# Altium PCB A6.PcbDoc
Units mm, origin at the board's own origin, x right, y up, seen from the top; angles counter-clockwise.
Board outline 91 x 91 mm, 2 copper layers (Top Layer, Bottom Layer); 15 components, 15 nets, 44 pads, 3 vias.
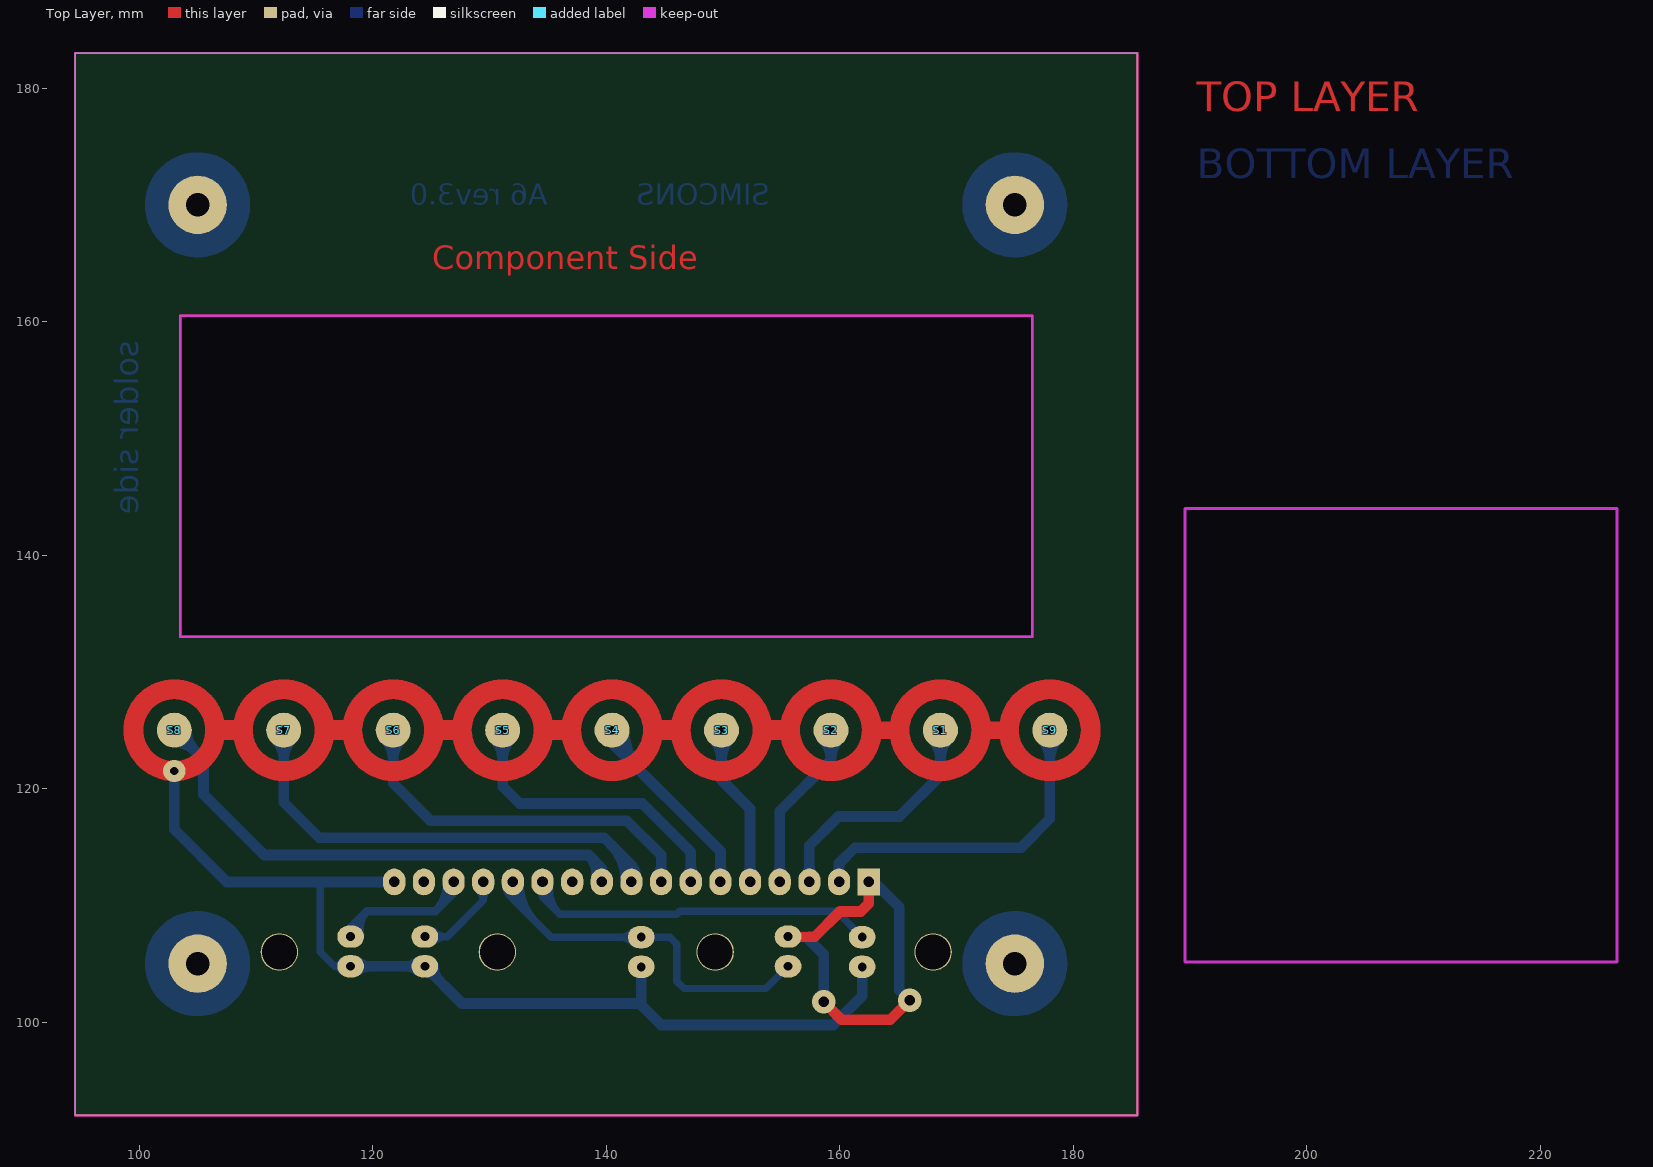
[diagram p0: Top Layer view]
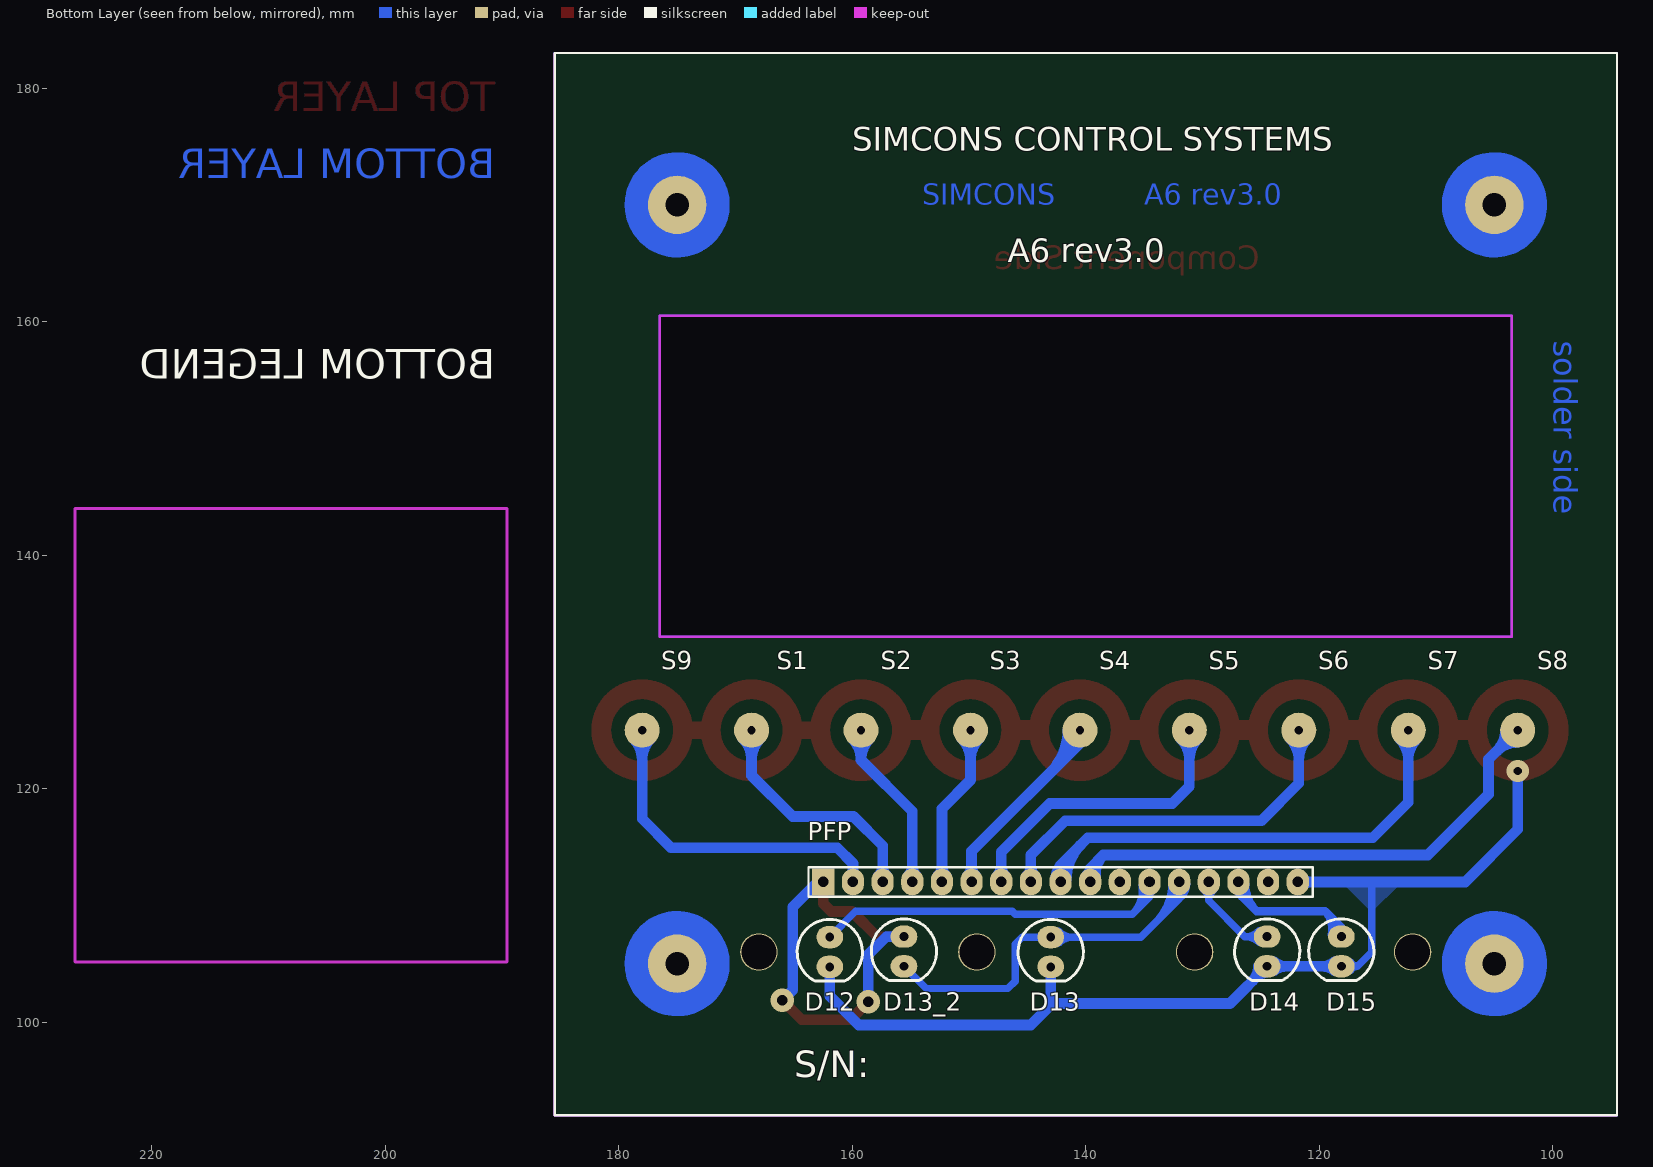
[diagram p1: Bottom Layer view, seen from below]

## Layer stack, top to bottom
Top Solder: solder mask 0.0102, Solder Resist, Dk 3.5
Top Layer: signal copper 0.0356
Dielectric1: dielectric 0.32, FR-4, Dk 4.8
Bottom Layer: signal copper 0.0356
Bottom Solder: solder mask 0.0102, Solder Resist, Dk 3.5

## Board outline
94.5,92 185.5,92 185.5,183 94.5,183
cut-out: 103.5,133 176.5,133 176.5,160.5 103.5,160.5

## Design rules (kind name [scope] priority, off if disabled: settings)
Clearance [All] p1: gap=0.508
PolygonConnect [All] p1: connectstyle=Direct reliefconductorwidth=0.254 reliefentries=4 polygonreliefangle="90 Angle" airgapwidth=0.254
RoutingVias [All] p1: holewidth=0.711 width=1.27 viastyle="Through Hole" minholewidth=0.711 minwidth=1.27 maxholewidth=1 maxwidth=2.286
SilkToSilkClearance [All] p1: silktosilkclearance=0
SilkToSolderMaskClearance SilkscreenOverComponentPads [IsPad] p1: minsilkscreentomaskgap=0 clearancetoexposedcopper=TRUE
SolderMaskExpansion [All] p1: expansion=0.102
Width [All] p1: maxlimit=2 minlimit=0.635 preferedwidth=0.635
27 further rules are at their usual default settings.

## Components (designator, comment, footprint, x,y, rotation, side; value= is the part's Value field where it differs from the comment)
D12 "RED LED 3MM" LEDSMALL 161.925,106 r180 bottom
D13 "GREEN LED 3MM" LEDSMALL 143,106 r180 bottom
D13_2 "GREEN LED 3MM" LEDSMALL 155.575,106.045 r180 bottom
D14 "GREEN LED 3MM" LEDSMALL 124.46,106.045 r180 bottom
D15 "YELLOW LED 3MM" LEDSMALL 118.11,106.045 r180 bottom
PFP "MHDR1X17" HDR1X17_BURGE_M_ST 162.48,112 r180 bottom locked
S1 "8MM DOM SWITCH" DOMKEY8MM 168.625,125 r0 top
S2 "8MM DOM SWITCH" DOMKEY8MM 159.25,125 r0 top
S3 "8MM DOM SWITCH" DOMKEY8MM 149.875,125 r0 top
S4 "8MM DOM SWITCH" DOMKEY8MM 140.5,125 r0 top
S5 "8MM DOM SWITCH" DOMKEY8MM 131.125,125 r0 top
S6 "8MM DOM SWITCH" DOMKEY8MM 121.75,125 r0 top
S7 "8MM DOM SWITCH" DOMKEY8MM 112.375,125 r0 top
S8 "8MM DOM SWITCH" DOMKEY8MM 103,125 r0 top
S9 "8MM DOM SWITCH" DOMKEY8MM 178,125 r0 top

## Footprints (in the part's own frame and the unit in brackets; to place one, negate y for a bottom-side part, rotate by r counter-clockwise, add the part's x,y. Pads: shape width x height; smd on the part's side, far side on the other; paste and mask are expansions set on the pad)
DOMKEY8MM [mm]
  round 3 hole 0.711: 1(0,0)
HDR1X17_BURGE_M_ST [mm] "Connector; Header; 17 Position"
  rect 1.905x2.286 hole 0.9: 1(0,0)
  oval 1.905x2.286 hole 0.9: 2(2.54,0) 3(5.08,0) 4(7.62,0) 5(10.16,0) 6(12.7,0) 7(15.24,0) 8(17.78,0) 9(20.32,0) 10(22.86,0) 11(25.4,0) 12(27.94,0) 13(30.48,0) 14(33.02,0) 15(35.56,0) 16(38.1,0) 17(40.64,0)
  silkscreen extent -1.27,-1.27 41.91,1.27, body extent -1.27,-1.27 41.91,1.27, height 8.54
LEDSMALL [mil]
  oval 90x75 hole 30: 1(0,50) 2(0,-50)
  silkscreen extent -110,-98 110,110, body extent -109,-110 110,110, height 340

## Part data
D12 D13 D13_2 D14 D15: library part LED1, "3mm LED"
PFP: "Header, 17-Pin"
S1 S2 S3 S4 S5 S6 S7 S8 S9: library part SW-PB, "Switch"

## Free pads (board coordinates)
  round 5 hole 2: 0(105,170) 1(175,170) 2(175,105) 3(105,105)
  round 3.2 hole 3: LED1(112,106) LED2(130.667,106) LED3(149.333,106) LED4(168,106)

## Via types
v1: diameter 2.032, hole 0.9, Top Layer to Bottom Layer, 2 vias
v2: diameter 1.905, hole 0.711, Top Layer to Bottom Layer, 1 vias

## Nets (pads, with @x,y where several pads share a name; then routed paths per layer and width w, separated by ;. In a path a pad name is that pad's centre, name@x,y a point inside that pad or via, vN(x,y) a via of type N, cw(c..) or ccw(c..) an arc to the next point about the centre after c; other vN are vias at no path point)
CDG_IN: PFP.10 S8.1 | length 52
  Bottom Layer w0.914: S8.1@103,123.957 cw(c103,121.44) 104.78,123.22 cw(c106.56,125) S8.1@104.043,125 ; S8.1 105.5,122.5 105.5,119.5 110.7,114.3 138.5,114.3 ; PFP.10@139.133,112.279 ccw(c136.885,112.685) 138.5,114.3 ; PFP.10@139.323,112.587 ccw(c138.879,113.18) 139.62,113.18 ; PFP.10@139.62,112 139.62,113.18 ; PFP.10@139.917,112.587 cw(c140.361,113.18) 139.62,113.18 ; 138.5,114.3 139.62,113.18
CM_IN: PFP.9 S7.1 | length 50.3
  Bottom Layer w0.914: S7.1@111.638,124.263 cw(c109.857,122.482) 112.375,122.482 cw(c114.893,122.482) S7.1@113.112,124.263 ; S7.1 112.375,118.825 115.427,115.773 139.827,115.773 142.16,113.44 PFP.9@142.16,112 ; 140.431,115.169 cw(c137.452,112.191) PFP.9@141.665,112.191 ; PFP.9@141.81,112.541 ccw(c140.964,113.386) 142.16,113.386 ccw(c143.356,113.386) PFP.9@142.51,112.541 ; 141.992,113.608 cw(c140.574,112.19) PFP.9@142.579,112.19
DOWN_IN: PFP.5 S3.1 | length 19.8
  Bottom Layer w0.914: S3.1@149.138,124.263 cw(c147.357,122.482) 149.875,122.482 cw(c152.393,122.482) S3.1@150.612,124.263 ; S3.1 149.875,120.725 152.32,118.28 PFP.5@152.32,112 ; PFP.5@151.97,112.541 ccw(c151.124,113.386) 152.32,113.386 ccw(c153.516,113.386) PFP.5@152.67,112.541
FAULTIND_P: D12.1 PFP.12 | length 43.4
  Bottom Layer w0.635: PFP.12@134.327,111.211 cw(c134.149,110.714) 134.673,110.782 cw(c135.197,110.85) PFP.12@134.899,111.285 ; PFP.12@134.54,112 134.54,110.697 ; D12.1 159.721,109.474 146.304,109.474 146.05,109.22 136.017,109.22 ; 134.54,110.697 cw(c135.197,110.697) 134.863,111.263 ccw(c135.197,110.697) 134.54,110.697 ; 134.54,110.697 ccw(c133.883,110.697) 134.217,111.263 cw(c133.883,110.697) 134.54,110.697 ; 134.54,110.697 136.017,109.22 ; 136.017,109.22 cw(c138.127,111.33) 135.169,111.725 ccw(c138.127,111.33) 136.017,109.22 ; PFP.12@134.54,111.809 ccw(c136.525,111.544) 135.109,110.128 cw(c136.525,111.544) PFP.12@134.54,111.809
GCONTACT_P: D13.1 D13_2.2 PFP.13 | length 56
  Bottom Layer w0.635: PFP.13@131.683,111.26 cw(c130.916,109.932) 132.397,110.329 cw(c133.878,110.725) PFP.13@132.55,111.492 ; PFP.13@132,112 132,110.57 ; D13_2.2 153.67,102.87 146.685,102.87 146.05,103.505 146.05,106.68 145.46,107.27 D13.1 135.3,107.27 132,110.57 ; 132,110.57 cw(c132.892,110.57) 132.371,111.294 ccw(c132.892,110.57) 132,110.57 ; 132,110.57 ccw(c131.108,110.57) 131.629,111.294 cw(c131.108,110.57) 132,110.57 ; 141.123,107.27 cw(c141.123,105.584) 142.316,106.776 ccw(c141.123,105.584) 141.123,107.27 ; 141.123,107.27 ccw(c141.123,108.956) 142.316,107.764 cw(c141.123,108.956) 141.123,107.27 ; PFP.13@131.365,111.809 ccw(c132.824,111.809) 131.792,110.778 cw(c132.824,111.809) PFP.13@131.365,111.809 ; PFP.13@132,111.809 ccw(c134.992,111.809) 132.876,109.694 cw(c134.992,111.809) PFP.13@132,111.809 ; PFP.13@132.635,111.809 ccw(c137.16,111.809) 133.96,108.61 cw(c137.16,111.809) PFP.13@132.635,111.809
GND: D12.2 D13.2 D14.2 D15.2 PFP.17 | length 718.8
  Top Layer w1.524: 162.75,125 165.125,125 ; 172.125,125 174.5,125
  Top Layer w1.7: 99.5,125 cw(c103,125) 106.5,125 ; 99.5,125 cw(c103,125) 106.5,125 ; 99.5,125 cw(c103,125) 106.5,125 ; 99.5,125 cw(c103,125) 106.5,125 ; 106.5,125 ccw(c103,125) 106.5,125 ; 106.5,125 108.875,125 ; 108.875,125 ccw(c112.375,125) 115.875,125 ; 108.875,125 ccw(c112.375,125) 115.875,125 ; 108.875,125 cw(c112.375,125) 115.875,125 ; 108.875,125 ccw(c112.375,125) 115.875,125 ; 108.875,125 cw(c112.375,125) 115.875,125 ; 108.875,125 cw(c112.375,125) 115.875,125 ; 115.875,125 118.25,125 ; 118.25,125 ccw(c121.75,125) 125.25,125 ; 118.25,125 ccw(c121.75,125) 125.25,125 ; 118.25,125 cw(c121.75,125) 125.25,125 ; 118.25,125 ccw(c121.75,125) 125.25,125 ; 118.25,125 cw(c121.75,125) 125.25,125 ; 118.25,125 cw(c121.75,125) 125.25,125 ; 125.25,125 127.625,125 ; 127.625,125 ccw(c131.125,125) 134.625,125 ; 127.625,125 ccw(c131.125,125) 134.625,125 ; 127.625,125 ccw(c131.125,125) 134.625,125 ; 127.625,125 cw(c131.125,125) 134.625,125 ; 127.625,125 cw(c131.125,125) 134.625,125 ; 127.625,125 cw(c131.125,125) 134.625,125 ; 134.625,125 137,125 ; 137,125 ccw(c140.5,125) 144,125 ; 137,125 ccw(c140.5,125) 144,125 ; 137,125 ccw(c140.5,125) 144,125 ; 137,125 cw(c140.5,125) 144,125 ; 137,125 cw(c140.5,125) 144,125 ; 137,125 cw(c140.5,125) 144,125 ; 144,125 146.375,125 ; 146.375,125 ccw(c149.875,125) 153.375,125 ; 146.375,125 ccw(c149.875,125) 153.375,125 ; 146.375,125 ccw(c149.875,125) 153.375,125 ; 146.375,125 cw(c149.875,125) 153.375,125 ; 146.375,125 cw(c149.875,125) 153.375,125 ; 146.375,125 cw(c149.875,125) 153.375,125 ; 153.375,125 155.75,125 ; 155.75,125 ccw(c159.25,125) 162.75,125 ; 155.75,125 ccw(c159.25,125) 162.75,125 ; 155.75,125 cw(c159.25,125) 162.75,125 ; 155.75,125 ccw(c159.25,125) 162.75,125 ; 155.75,125 cw(c159.25,125) 162.75,125 ; 155.75,125 cw(c159.25,125) 162.75,125 ; 165.125,125 ccw(c168.625,125) 172.125,125 ; 165.125,125 ccw(c168.625,125) 172.125,125 ; 165.125,125 ccw(c168.625,125) 172.125,125 ; 165.125,125 cw(c168.625,125) 172.125,125 ; 165.125,125 cw(c168.625,125) 172.125,125 ; 165.125,125 cw(c168.625,125) 172.125,125 ; 174.5,125 ccw(c178,125) 181.5,125 ; 174.5,125 ccw(c178,125) 181.5,125 ; 174.5,125 ccw(c178,125) 181.5,125 ; 174.5,125 cw(c178,125) 181.5,125 ; 174.5,125 cw(c178,125) 181.5,125 ; 174.5,125 cw(c178,125) 181.5,125
  Bottom Layer w0.635: 115.5,112 115.5,106 116.725,104.775 ; D15.2 116.725,104.775 ; 116.725,104.775 cw(c116.725,104.103) 117.311,104.432 ccw(c116.725,104.103) 116.725,104.775 ; 116.725,104.775 ccw(c116.725,105.447) 117.311,105.118 cw(c116.725,105.447) 116.725,104.775
  Bottom Layer w0.914: v2@103,120.8 103,116.5 107.5,112 115.5,112 PFP.17@121.84,112 ; D15.2 D14.2 127.648,101.587 142.875,101.587 ; D13.2 143,101.712 142.875,101.587 ; D12.2 161.925,102.227 159.444,99.746 144.716,99.746 142.875,101.587 ; 119.65,104.775 cw(c119.65,106.124) 118.696,105.17 ccw(c119.65,106.124) 119.65,104.775 ; 119.65,104.775 ccw(c119.65,103.426) 118.696,104.38 cw(c119.65,103.426) 119.65,104.775 ; 120.644,112 cw(c120.644,110.804) 121.49,111.65 ccw(c120.644,110.804) 120.644,112 ; 120.644,112 ccw(c120.644,113.196) 121.49,112.35 cw(c120.644,113.196) 120.644,112 ; 122.92,104.775 cw(c122.92,103.426) 123.874,104.38 ccw(c122.92,103.426) 122.92,104.775 ; 122.92,104.775 ccw(c122.92,106.124) 123.874,105.17 cw(c122.92,106.124) 122.92,104.775 ; D14.2@124.65,104.216 cw(c124.65,103.327) 125.279,103.956 ccw(c124.65,103.327) D14.2@124.65,104.216 ; D14.2@125.209,104.775 ccw(c127.018,104.775) 125.739,103.496 cw(c127.018,104.775) D14.2@125.209,104.775
  other v2: 103,121.5
M_IN: PFP.6 S4.1 | length 25.1
  Bottom Layer w0.914: S4.1 140.5,123.9 149.78,114.62 PFP.6@149.78,112 ; S4.1@140.628,125 ccw(c143.594,125) 141.497,122.903 ; S4.1@141.543,125 ccw(c146.716,125) 143.058,121.342 ; PFP.6@149.43,112.541 ccw(c148.584,113.386) 149.78,113.386 ccw(c150.976,113.386) PFP.6@150.13,112.541
MANUAL_P: D15.1 PFP.15 | length 28.2
  Bottom Layer w0.711: D15.1 118.11,108.11 119.5,109.5 ; D15.1@118.336,107.279 ccw(c116.905,108.754) 118.96,108.722 ; PFP.15@126.92,112 126.92,111.045 125.375,109.5 119.5,109.5 ; 119.5,109.5 ccw(c121.005,107.995) 118.941,107.476 cw(c121.005,107.995) 119.5,109.5 ; D15.1@118.251,107.303 cw(c119.588,107.639) 118.613,108.613 ccw(c119.588,107.639) D15.1@118.251,107.303 ; 125.375,109.5 ccw(c123.086,111.789) 126.323,111.806 cw(c123.086,111.789) 125.375,109.5 ; 126.58,110.705 ccw(c125.483,111.802) 127.034,111.81 cw(c125.483,111.802) 126.58,110.705
MCONTACT_P: D14.1 PFP.14 | length 17.3
  Bottom Layer w0.635: D14.1 126.365,107.315 129.46,110.41 ; PFP.14@129.46,112 129.46,110.41 ; 126.337,107.315 cw(c126.337,109.001) 125.144,107.809 ccw(c126.337,109.001) 126.337,107.315 ; 126.337,107.315 ccw(c126.337,105.629) 125.144,106.821 cw(c126.337,105.629) 126.337,107.315 ; 129.46,110.41 cw(c130.685,110.41) 129.878,111.332 ccw(c130.685,110.41) 129.46,110.41 ; 129.46,110.41 ccw(c128.235,110.41) 129.042,111.332 cw(c128.235,110.41) 129.46,110.41
RESET: PFP.2 S9.1 | length 32.8
  Bottom Layer w0.914: PFP.2@159.94,112 159.94,113.585 161.29,114.935 175.535,114.935 178,117.4 S9.1 ; S9.1@177.263,124.263 cw(c175.482,122.482) 178,122.482 cw(c180.518,122.482) S9.1@178.737,124.263
SET_IN: PFP.3 S1.1 | length 26.5
  Bottom Layer w0.914: PFP.3@157.05,112.541 ccw(c156.204,113.386) 157.4,113.386 ccw(c158.596,113.386) PFP.3@157.75,112.541 ; PFP.3@157.4,112 157.4,115.1 159.9,117.6 165.1,117.6 168.625,121.125 S1.1 ; S1.1@167.888,124.263 cw(c166.107,122.482) 168.625,122.482 cw(c171.143,122.482) S1.1@169.362,124.263
START_IN: PFP.7 S5.1 | length 31.7
  Bottom Layer w0.914: S5.1@130.388,124.263 cw(c128.607,122.482) 131.125,122.482 cw(c133.643,122.482) S5.1@131.862,124.263 ; S5.1 131.125,120.175 132.58,118.72 143.08,118.72 147.24,114.56 PFP.7@147.24,112 ; PFP.7@146.89,112.541 ccw(c146.044,113.386) 147.24,113.386 ccw(c148.436,113.386) PFP.7@147.59,112.541
STOP_IN: PFP.8 S6.1 | length 38.2
  Bottom Layer w0.914: S6.1@121.013,124.263 cw(c119.232,122.482) 121.75,122.482 cw(c124.268,122.482) S6.1@122.487,124.263 ; S6.1 121.75,120.45 124.954,117.246 141.754,117.246 144.7,114.3 PFP.8@144.7,112 ; PFP.8@144.35,112.541 ccw(c143.504,113.386) 144.7,113.386 ccw(c145.896,113.386) PFP.8@145.05,112.541
UPIN: PFP.4 S2.1 | length 20.7
  Bottom Layer w0.914: PFP.4@154.51,112.541 ccw(c153.664,113.386) 154.86,113.386 ccw(c156.056,113.386) PFP.4@155.21,112.541 ; PFP.4@154.86,112 154.86,118.06 159.25,122.45 S2.1 ; S2.1@158.513,124.263 cw(c156.732,122.482) 159.25,122.482 cw(c161.768,122.482) S2.1@159.987,124.263
VCC: D13_2.1 PFP.1 | length 38.2
  Top Layer w0.914: D13_2.1 157.861,107.315 160.02,109.474 161.798,109.474 162.48,110.156 PFP.1 ; v1(158.623,101.727) 160.147,100.203 164.338,100.203 v1(165.989,101.854)
  Bottom Layer w0.914: D13_2.1 157.099,107.315 158.623,105.791 v1(158.623,101.727) ; PFP.1 162.955,112 165.1,109.855 165.1,102.743 v1(165.989,101.854)
pads on no net: PFP.11 PFP.16
copper on no net: | length 1205.4
  Top Layer w0.2: 103.5,133 176.5,133 176.5,160.5 103.5,160.5 103.5,133
  Top Layer w0.203: 94.5,92 94.5,183 185.5,183 185.5,92 94.5,92
  Bottom Layer w0.2: 103.5,133 176.5,133 176.5,160.5 103.5,160.5 103.5,133
  Bottom Layer w0.203: 94.5,92 94.5,183 185.5,183 185.5,92 94.5,92
  Bottom Layer w3: 108,105 ccw(c105,105) 108,105 ; 108,170 ccw(c105,170) 108,170 ; 178,105 ccw(c175,105) 178,105 ; 178,170 ccw(c175,170) 178,170

## Polygon pours and split planes (outlines as drawn)
GND on Bottom Layer "Polygon" (solid, remove dead copper, pour order 4): 113.411,112 117.729,112 117.729,111.633 115.697,109.601 115.316,109.601 113.284,111.633 113.157,111.633

## Keep-outs
Keep-Out Layer:
  lines w0.2: 94.5,92 185.5,92 185.5,183 94.5,183 94.5,92 ; 103.5,133 176.5,133 176.5,160.5 103.5,160.5 103.5,133
  lines w0.254: 189.575,105.143 226.575,105.143 226.575,143.979 189.575,143.979 189.575,105.143
  text "KEEPOUT LAYER" at 191,139 h1.78
  text "PCB INFORMATION:" at 191,135 h1.78
  text "PCB: FR-4" at 191,131 h1.78
  text "THICKNESS:35MICRONS" at 191,127 h1.78
  text "LAYERS TO PRINT:" at 191,122 h1.78
  text "TOP LAYER CU" at 197,118 h1.52
  text "TOP SOLDER" at 197,115 h1.52
  text "BOTTOM LEGEND" at 197.318,112.201 h1.52
  text "BOTTOM SOLDER" at 197.318,109.18 h1.52
  text "BOTTOM LAYER CU" at 197.318,106.159 h1.52
  text "MOUNTING HOLES ARE 2MM DIA" at 190,100.5 h2.54
  text "There are four LED holes of 3mm diameter" at 190,94.5 h2.54

## Other copper
Top Layer:
  text "TOP LAYER" at 190.595,178 h2.54
  text "Component Side" at 125.095,164.465 h2
Bottom Layer:
  text "BOTTOM LAYER" at 190.595,172.273 h2.54
  text "A6 rev3.0" at 135,170 h1.78
  text "SIMCONS" at 154,170 h1.78
  text "solder side" at 99.93,158.35 h2 r90

## Silkscreen, mask and mechanical layers (free items; w line width, h text height)
Bottom Overlay:
  the board outline again, w0.203
  text "SIMCONS CONTROL SYSTEMS" at 160.02,174.625 h2.03
  text "A6 rev3.0" at 146.685,165.1 h2.03
  text "BOTTOM LEGEND" at 190.595,155.094 h2.54
  text "S/N:" at 164.973,95.25 h2.29
Top Solder:
  the board outline again, w0.203
  text "TOP SOLDER" at 190.595,160.82 h2.54
Bottom Solder:
  the board outline again, w0.203
  text "BOTTOM SOLDER" at 190.595,166.547 h2.54